# EAGLE board bmf (EAGLE 7.6.0)
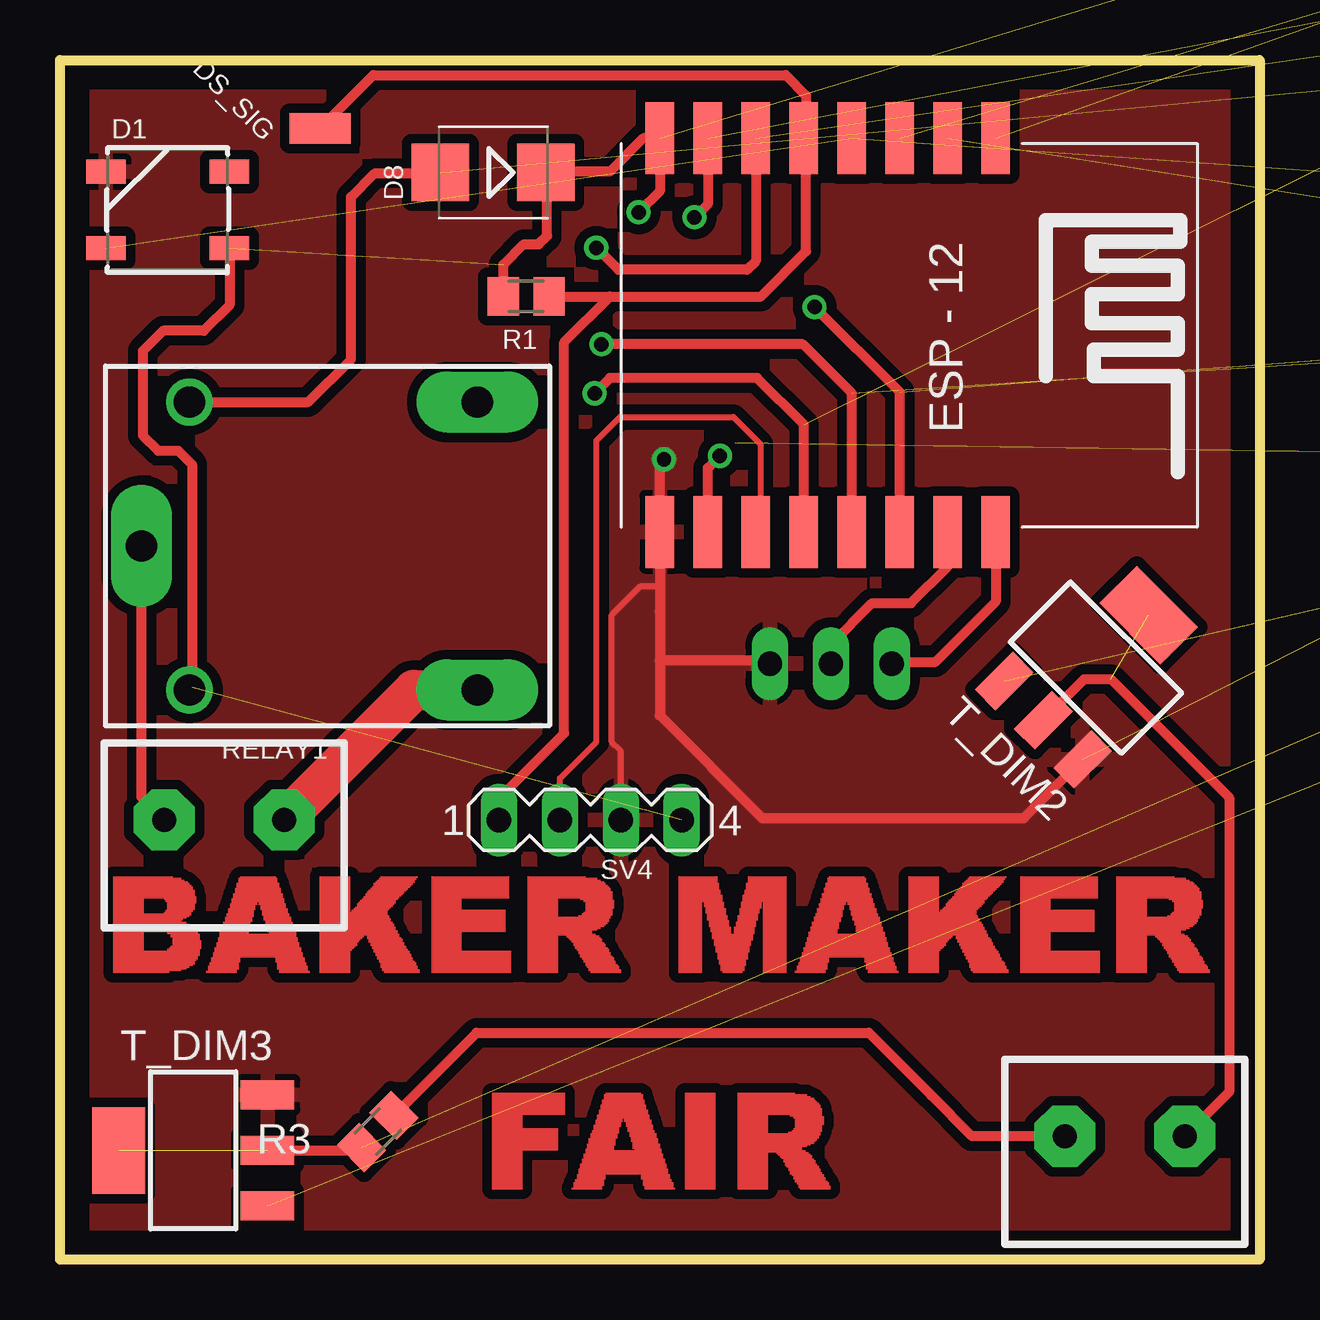
[diagram p0: board, top side]
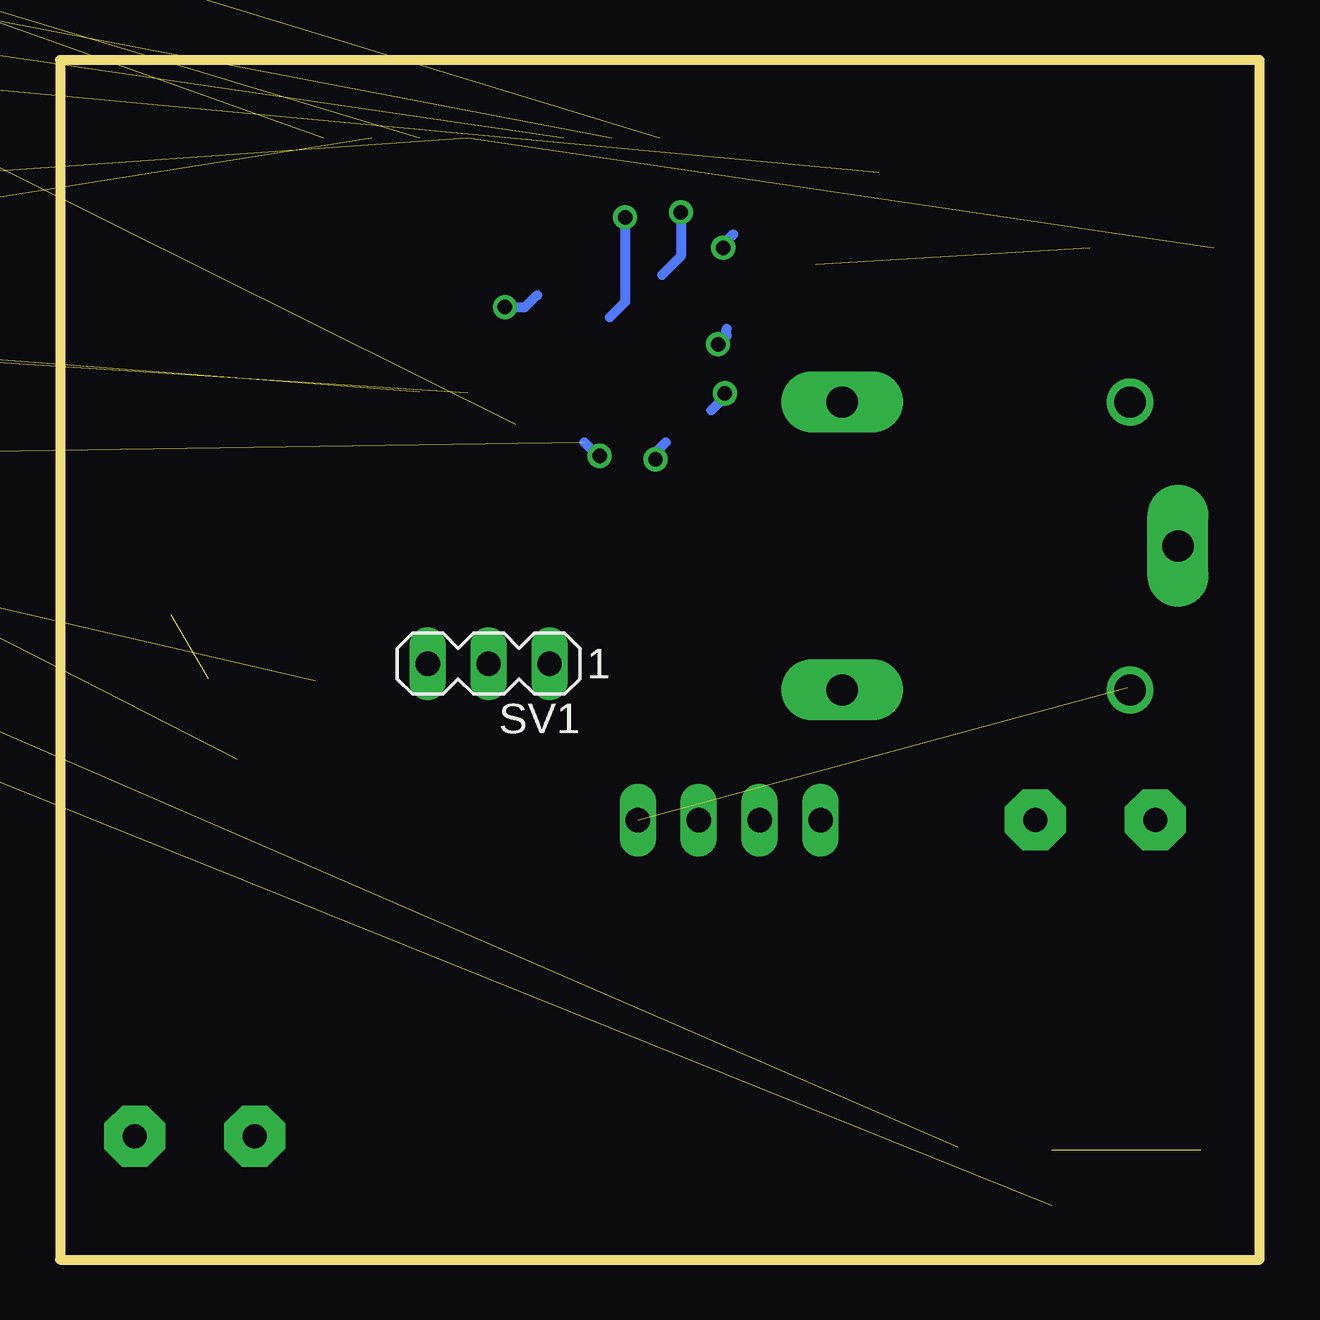
[diagram p1: board, bottom side, seen from below]

Size 50 x 50 mm. Coordinates in mm from the lower left corner, seen from the top.
Outline: 0,0 0,50 50,50 50,0 0,0
Copper layers (1*16): Top 0.035mm / dielectric 1.5mm / Bottom 0.035mm
Design rules "default": minimum track width 10mil, minimum drill 24mil, track to track 8mil, track to pad 8mil, pad to pad 8mil, via to via 8mil, smd to smd 8mil, copper to edge 40mil, drill to drill 8mil, minimum pad ring 10mil, minimum via ring 8mil, stop-mask expansion 4mil, vias tented up to drill 0mil, thermal gap 10mil
tRestrict: area 76.7,58 to 84.6,75.4
bRestrict: area 76.7,57.9 to 84.7,75.3

## Footprints (pad centres in the part's own frame; a part is rotated, then mirrored left to right if it is on the bottom)
WS2812B = smd 1.651 x 1: 1 -2.577,1.6; 2 -2.577,-1.6; 3 2.577,-1.6; 4 2.577,1.6
SMB = smd 2.4 x 2.4: A 2.2,0; C -2.2,0
SMD_SJ_3WAY_CLOSED = smd 1.168 x 1.6: 1 -1.524,0; 2 0,0; 3 1.524,0
SMD1,27-2,54 = smd 1.27 x 2.54: 1 0,0
MOTION-PIR-DYP-ME003_FRAMELESS = drill 1 square: 1 -3.81,-10.16 | drill 1: 2 -1.27,-10.16; 3 1.27,-10.16; 4 13.27,5.23; 5 13.27,7.77; 6 13.27,10.31 | hole 1.8: -15.37,0; 12.83,0
M0805 = smd 1.3 x 1.6: 1 -0.95,0; 2 0.95,0
SOT223 = smd 1.219 x 2.235: 1 -2.311,-3.099; 2 0,-3.099; 3 2.311,-3.099 | smd 3.6 x 2.2: 4 0,3.099
SRD-05VDC-SL-C = drill 1.3: COIL0 -5.39,-6.12; COIL1 -5.39,5.88 | drill 1.3 pad 2.54 long: SWCLOSED 6.61,-6.12; SWCOMMON -7.39,-0.12; SWOPEN 6.61,5.88
TACTILE-SWITCH-SMD = smd 1.524 x 0.762: 1 -2.794,1.905; 2 2.794,1.905; 3 -2.794,-1.905; 4 2.794,-1.905
MA03-1 = drill 1.016 long: 1 -2.54,0; 2 0,0; 3 2.54,0
MA04-1 = drill 1.016 long: 1 -3.81,0; 2 -1.27,0; 3 1.27,0; 4 3.81,0
ESP12-SMD = smd 3 x 1.2: ADC -8.3,3.8; CH_PD -8.3,1.8; GND 8.1,-8.2; GPIO0 8.1,-2.2; GPIO2 8.1,-4.2; GPIO4 8.1,1.8; GPIO5 8.1,-0.2; GPIO12 -8.3,-4.2; GPIO13 -8.3,-6.2; GPIO14 -8.3,-2.2; GPIO15 8.1,-6.2; GPIO16 -8.3,-0.2; RESET -8.3,5.8; RXD0 8.1,3.8; TXD0 8.1,5.8; VCC -8.3,-8.2
2_SCREW_PIN = drill 1 pad 2.54 octagon: P$1 -2.5,0.5; P$2 2.5,0.5
MP1584EN = drill 0.8 long: GNDIN 1.778,14.986; GNDOUT 20.32,14.986; VIN 1.778,1.778; VOUT 20.32,1.778

## Placement (x,y rotation side)
D1  [WS2812B]  4.49,43.75 180 top
D8  ES2D  [SMB]  18.06,45.31 180 top
DP2  SMD_SJ_3WAY_CLOSED  [SMD_SJ_3WAY_CLOSED]  114.6,41.5 180 top  (outside the outline)
DP3  SMD_SJ_3WAY_CLOSED  [SMD_SJ_3WAY_CLOSED]  106.2,41.5 180 top  (outside the outline)
DS_GND  [SMD1,27-2,54]  116,57.6 90 top  (outside the outline)
DS_SIG  [SMD1,27-2,54]  10.85,47.16 90 top
DS_VCC  [SMD1,27-2,54]  116,60.1 90 top  (outside the outline)
PIR1  MOTION-PIR-DYP-ME003  [MOTION-PIR-DYP-ME003_FRAMELESS]  113.9,60.13 270 top  (outside the outline)
R1  4.7k  [M0805]  19.43,40.14 180 top
R2  4.7k  [M0805]  108.7,47.3 270 bottom  (outside the outline)
R3  4.7k  [M0805]  13.25,5.34 225 top
R4  10k  [M0805]  85.4,64.2 90 bottom  (outside the outline)
R5  10k  [M0805]  98,70.1 180 bottom  (outside the outline)
R6  10k  [M0805]  89.4,64.1 90 bottom  (outside the outline)
RELAY  DMN6068SE-13  [SOT223]  149.48,60.93 180 bottom  (outside the outline)
RELAY1  SRD-05VDC-SL-C  [SRD-05VDC-SL-C]  10.79,29.86 0 top
S1  TAC_SWITCHSMD  [TACTILE-SWITCH-SMD]  113.8,72.7 0 top  (outside the outline)
SV1  [MA03-1]  32.13,24.84 180 bottom
SV4  [MA04-1]  22.11,18.31 0 top
T_DIM1  DMN6068SE-13  [SOT223]  121.1,40.5 0 bottom  (outside the outline)
T_DIM2  DMN6068SE-13  [SOT223]  43.18,24.67 315 top
T_DIM3  DMN6068SE-13  [SOT223]  5.55,4.55 90 top
U1  [ESP12-SMD]  33.2,38.43 270 top
U$1  LOGO_10X10_SILK  [LOGO2_10X10_SILK]  101.8,56.9 0 bottom  (outside the outline)
U$2  V1  [2_SCREW_PIN]  44.39,4.64 0 top
U$3  V1  [2_SCREW_PIN]  121.1,32.5 0 top  (outside the outline)
U$4  LOGO_NO_TRASHNO_TRASH  [LOGO_ROHS_NO_TRASH]  117.3,50.7 0 bottom  (outside the outline)
U$7  V1  [2_SCREW_PIN]  91.1,32.5 0 top  (outside the outline)
U$8  V1  [2_SCREW_PIN]  6.84,17.83 0 top
U$9  LOGO_NO_TRASHROHS  [LOGO_ROHS_SYM]  100.7,51.7 0 top  (outside the outline)
U$10  V1  [2_SCREW_PIN]  101.1,32.5 0 top  (outside the outline)
U$11  LOGO_10X10_SILK  [LOGO2_10X10_SILK]  83.9,41.6 0 top  (outside the outline)
U$12  MP1584EN  [MP1584EN]  77.8,54.7 180 bottom  (outside the outline)

## Library data of the parts
D1 = SparkFun-LED; PROD_ID: DIO-12503
D8 = diode
DP2 DP3 RELAY1 U$1-U$4 U$7-U$12 = JKW_CHIP
DS_GND DS_SIG DS_VCC = wirepad
PIR1 = diy-modules
R1-R6 = rcl
RELAY T_DIM1-T_DIM3 = transistor-power
S1 = SparkFun-Retired; PROD_ID: SWCH-08247
SV1 SV4 = con-lstb; OC_FARNELL: unknown; OC_NEWARK: unknown
U1 = esp8266modules

## Nets
A_IN: U1.ADC U$3.P$2
DHT_SIG/SDA: SV4.2 U1.GPIO2
DIMM1: DP2.3 DP3.3 T_DIM1.1 U1.GPIO4
DIMM3: D1.4 DP3.1 U1.GPIO16
DIMMING1: T_DIM1.2 T_DIM1.4 U$3.P$1
DIMMING2: T_DIM2.2 T_DIM2.4 U$2.P$2
DIMMING3: R3.1 U$2.P$1
EARTH_HUM_POW: R5.1 U1.GPIO15 U$10.P$1
GND: D1.3 DS_GND.1 PIR1.3 R2.1 R5.2 RELAY.3 S1.3 SV1.1 SV4.3 T_DIM1.3 T_DIM2.3 T_DIM3.3 U1.GND U$7.P$2 U$10.P$2 U$12.GNDIN U$12.GNDOUT
IN1: RELAY1.SWCOMMON U$8.P$1
N$1: R6.1 U1.CH_PD
N$2: R4.1 U1.RESET
N$3: R2.2 R3.2 T_DIM3.2 T_DIM3.4
N$4: SV1.3 U1.TXD0
N$6: SV1.2 U1.RXD0
N$7: S1.1 U1.GPIO0
N$8: DP2.1 U1.GPIO5
N$17: U$7.P$1 U$12.VIN
N$20: DP3.2 T_DIM3.1
N$21: DP2.2 T_DIM2.1
NORMALLY_OPEN: RELAY1.SWCLOSED U$8.P$2
PIR: PIR1.2 U1.GPIO13
RELAY: RELAY.1 U1.GPIO12
RELAY_LO3: D8.A RELAY1.COIL1 RELAY.2 RELAY.4
SCL: DS_SIG.1 R1.1 SV4.1 U1.GPIO14
VCC: PIR1.1
VDD: D1.1 D8.C DS_VCC.1 PIR1.4 R1.2 R4.2 R6.2 RELAY1.COIL0 SV4.4 U1.VCC U$12.VOUT

## Tracks (layer width: path | path; a pad name or v marks a point on that pad's centre or on a via)
A_IN  (1 unrouted)
DHT_SIG/SDA
  Top 0.254: SV4.2 20.84,20.06 22.36,21.58 22.36,34.13 23.34,35.12 28.07,35.12 29.2,33.99 29.2,30.53 U1.GPIO2
DIMM1  (via drill 0.6)  (3 unrouted)
  Top 0.406: U1.GPIO4 35,36.16 v31.45,39.7
  Bottom 0.406: v31.45,39.7 30.61,39.7 30.11,40.2
DIMM3  (2 unrouted)
DIMMING1  (2 unrouted)
DIMMING2  (1 unrouted)
  Top 0.406: T_DIM2.2 42.7,24.19 43.79,24.19 48.73,19.25 48.73,6.99 U$2.P$2
DIMMING3
  Top 0.406: U$2.P$1 38.02,5.14 36.32,6.84 35.26,7.9 33.71,9.45 17.36,9.45 R3.1
EARTH_HUM_POW  (via drill 0.6)  (2 unrouted)
  Top 0.406: U1.GPIO15 27,32.99 v27.5,33.5
  Bottom 0.406: v27.5,33.5 27.57,33.5 28.14,34.06
GND  (via drill 0.6)  (2 unrouted)
  Top 0.254: SV4.3 23.38,21.19 22.99,21.58 22.99,26.87 24.19,28.07 25,28.07 | 24.93,26.94 25,27.01
  Top 0.406: 25,24.96 25,27.01 25,28.07 U1.GND 25,33.18 v25.18,33.36 | 25,24.96 25,22.67 29.27,18.41 40.18,18.41 T_DIM2.3 | SV1.1 29.47,24.96 25,24.96
  Bottom 0.406: v25.18,33.36 25.18,33.64 24.75,34.06
  pour Top (isolate 0.406, rank 6): 126,48.9 119.9,48.9 119.9,77.9 84.9,77.8 85.3,77.8 85.3,57.3 76.3,57.3 76.3,28.2 126,28.1
  pour Bottom (isolate 0.406): 85.3,77.9 119.9,77.9 119.9,48.9 126,48.9 126,28.1 76.3,28.2 76.3,57.3 85.3,57.3
  pour Top (isolate 0.406): 0,0 50,0 50,50 0,50
IN1
  Top 0.406: U$8.P$1 3.4,19.27 RELAY1.SWCOMMON
N$1  (1 unrouted)
N$2  (1 unrouted)
N$3  (2 unrouted)
  Top 0.406: T_DIM3.2 12.46,4.55 R3.2
N$4
  Top 0.406: U1.TXD0 39,27.43 36.46,24.89 34.73,24.89 SV1.3
N$6
  Top 0.406: SV1.2 32.13,25.65 33.85,27.36 35.47,27.36 37,28.89 U1.RXD0
N$7  (via drill 0.6)  (1 unrouted)
  Top 0.406: U1.GPIO0 31,34.8 29.05,36.74 22.92,36.74 v22.29,36.11
  Bottom 0.406: v22.29,36.11 22.29,35.97 22.85,35.4
N$8  (via drill 0.6)  (1 unrouted)
  Top 0.406: U1.GPIO5 33,36.11 30.96,38.15 v22.57,38.15
  Bottom 0.406: v22.57,38.15 22.21,38.51 22.21,38.79
N$17  (1 unrouted)
N$20  (1 unrouted)
N$21  (1 unrouted)
NORMALLY_OPEN
  Top 1.676: U$8.P$2 14.75,23.74 RELAY1.SWCLOSED
PIR  (via drill 0.6)  (1 unrouted)
  Top 0.406: U1.GPIO13 27,44 v26.45,43.44
  Bottom 0.406: v26.45,43.44 26.45,39.91 27.08,39.28
RELAY  (via drill 0.6)  (1 unrouted)
  Top 0.406: U1.GPIO12 29,41.62 28.63,41.26 23.27,41.26 v22.36,42.17
  Bottom 0.406: v22.36,42.17 22.36,42.31 21.93,42.74
RELAY_LO3  (2 unrouted)
  Top 0.406: RELAY1.COIL1 10.35,35.74 12.13,37.52 12.13,44.29 13.12,45.27 15.83,45.27 D8.A
SCL
  Top 0.406: R1.1 22.92,40.14 | 22.92,40.14 29.21,40.14 31.1,42.03 31.1,46.63 | 31.1,46.63 U1.GPIO14 | DS_SIG.1 13.06,49.37 30.25,49.37 31.1,48.52 31.1,46.63 | SV4.1 18.3,19.21 21.02,21.93 21.02,38.24 22.92,40.14
VDD  (via drill 0.6)  (7 unrouted)
  Top 0.406: D1.1 7.07,39.79 5.99,38.72 4.3,38.72 3.46,37.87 3.46,34.34 4.09,33.71 4.94,33.71 5.5,33.15 5.5,23.84 RELAY1.COIL0 | R1.2 18.48,41.47 19.32,42.31 19.96,42.31 20.31,42.67 20.31,45.25 D8.C 20.3,45.35 22.92,45.35 24.3,46.73 U1.VCC 25,44.53 v24.12,43.65
  Bottom 0.406: v24.12,43.65 24.12,41.82 24.89,41.04
(copper drawn outside any net)
  shapes: Top area x1205

## Text on the board
tNames: SMARTHOME / ESPtiny / v01 | 2017
bNames: DIMM3 | DIMM | RIN | RO | VCC | GND | D8 | GND | DIMM2 | ADC0